# Altium PCB Dollatest.PcbDoc
Units mil, origin at the board's own origin, x right, y up, seen from the top; angles counter-clockwise.
Board outline 3946.14 x 6250.17 mil, 2 copper layers (Top Layer, Bottom Layer); 19 components, 13 nets, 71 pads, 1 vias.
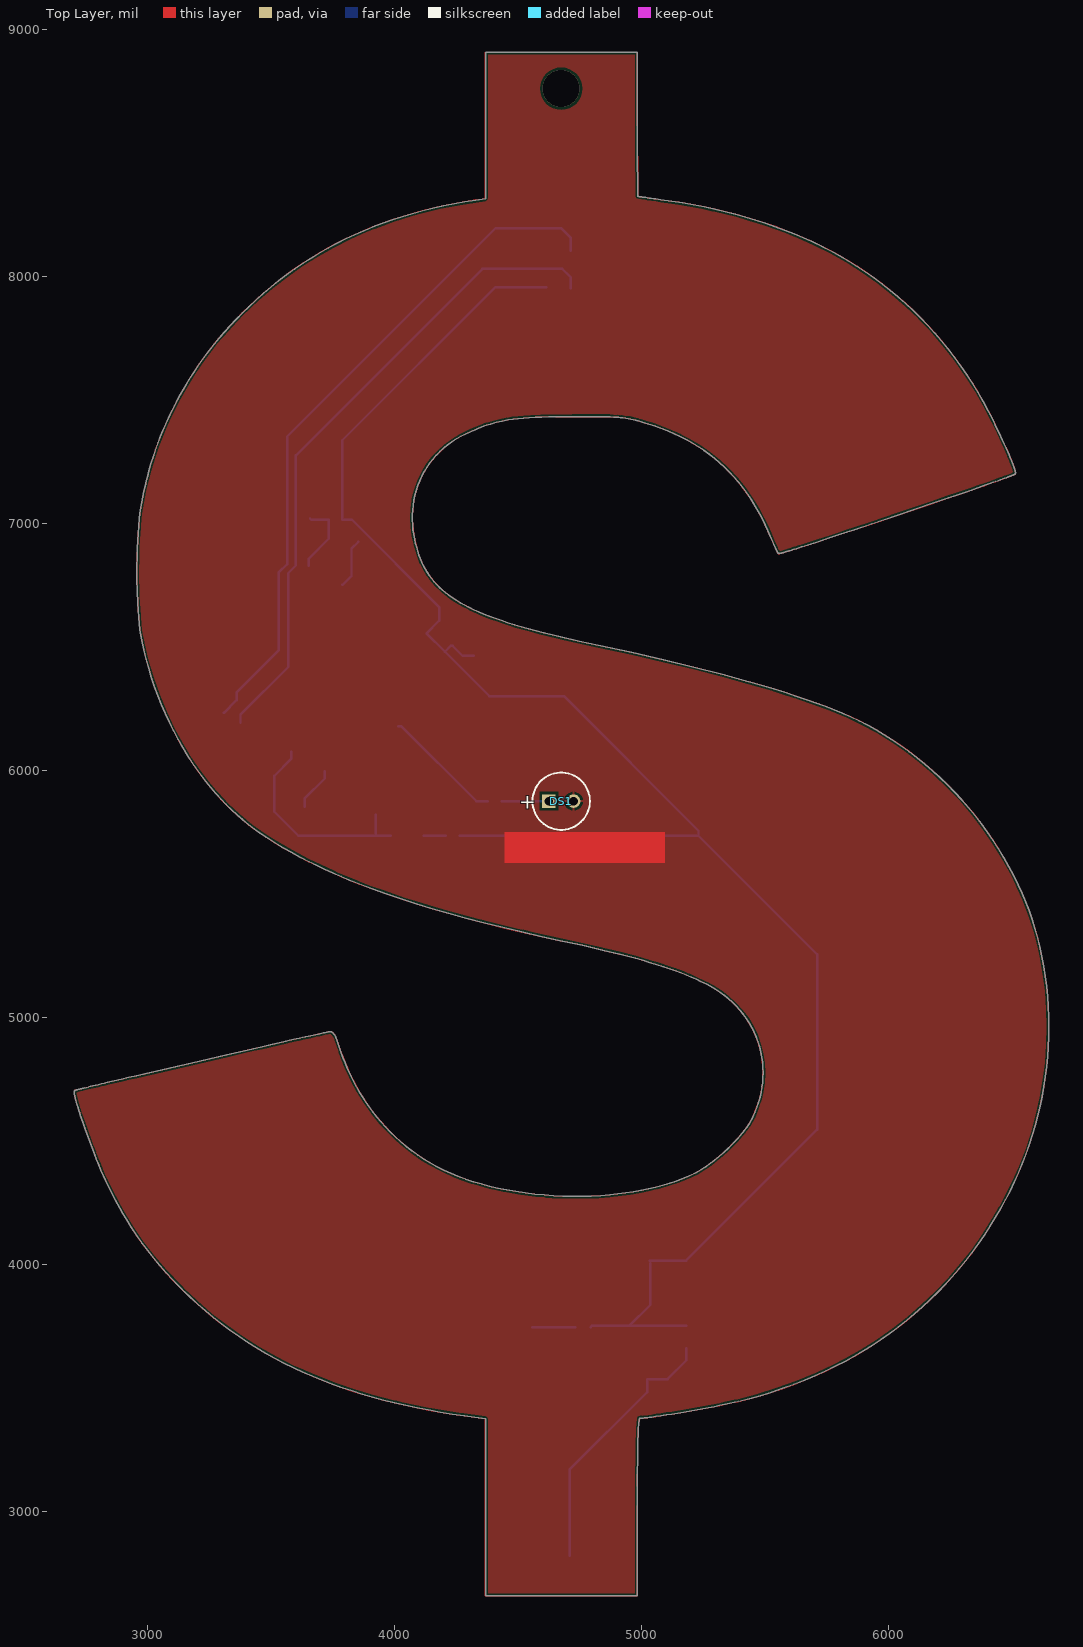
[diagram p0: Top Layer view]
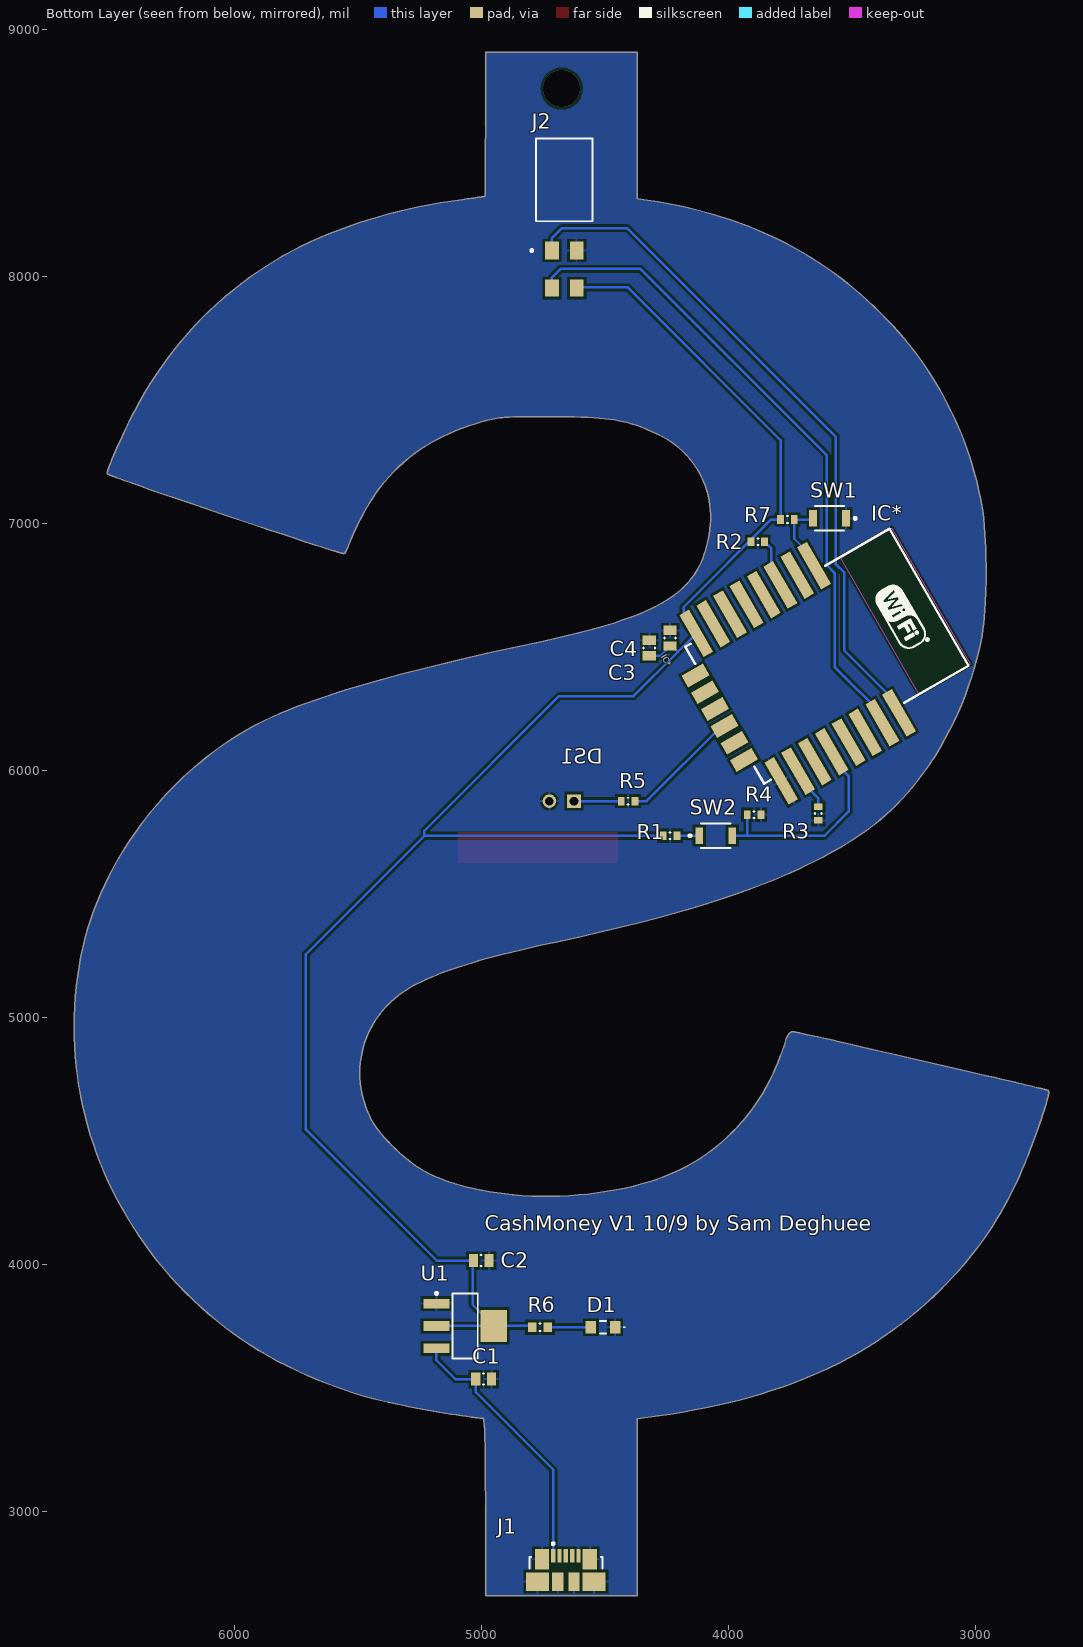
[diagram p1: Bottom Layer view, seen from below]

## Layer stack, top to bottom
Top Solder: solder mask 0.4, Solder Resist, Dk 3.5
Top Layer: signal copper 1.4
Dielectric 1: dielectric 12.6, FR-4, Dk 4.8
Bottom Layer: signal copper 1.4
Bottom Solder: solder mask 0.4, Solder Resist, Dk 3.5

## Board outline
1819 vertices, not listed, extent 2702.07,2657.39 6648.21,8907.56

## Design rules (kind name [scope] priority, off if disabled: settings)
Clearance [All] p1: gap=10 ignorepadtopadclearanceinfootprint=FALSE except(0: Arc-Hole Track-Hole SMDPad-Hole THPad-Hole Via-Hole Fill-Hole Poly-Hole Region-Hole Text-Hole)
PolygonConnect [All] p1: connectstyle=Relief reliefconductorwidth=10 reliefentries=4 polygonreliefangle="90 Angle" airgapwidth=10
RoutingVias [All] p1: holewidth=28 width=50 viastyle="Through Hole" minholewidth=28 minwidth=50 maxholewidth=28 maxwidth=50
SolderMaskExpansion [All] p1: expansion=4
Width [All] p1: maxlimit=10 minlimit=10 preferedwidth=10
30 further rules are at their usual default settings.

## Components (designator, comment, footprint, x,y, rotation, side; value= is the part's Value field where it differs from the comment)
C1 "100nF" CAPC0805(2012)145_L 4990,3535 r0 bottom
C2 "10uF" CAPC0805(2012)145_L 5000,4015 r0 bottom
C3 "1uF" CAPC0805(2012)145_L 4319.29,6495 r270 bottom
C4 "0.1uF" CAPC0805(2012)145_L 4235,6535 r270 bottom
D1 "LTST-C171AKT" LTST-C171AKT_V 4506.69,3745 r180 bottom
DS1 "WP7113SGC" KING-WP7113SGC_V 4674,5875 r0 top
IC* "ESP8266 ESP-12-E" "ESP8266 ESP-12-E" 3867.41,5909.33 r240 bottom
J1 "47346-0001" MOLX-47346-0001-5_V 4657.03,2722.87 r180 bottom
J2 "SMH-102-02-T-D" SMTC-SMH-102-02-X-D 4663.34,8240 r180 bottom
R1 "10K" RESC0603(1608)_L 4235,5735 r180 bottom
R2 "100K" RESC0603(1608)_L 3880,6925 r180 bottom
R3 "470R" RESC0603(1608)_L 3635,5825 r90 bottom
R4 "470R" RESC0603(1608)_L 3895,5820 r0 bottom
R5 "100K" RESC0603(1608)_L 4405,5875 r180 bottom
R6 "300R 5% 0603(1608)" RESC0603(1608)_N 4761.69,3745 r0 bottom value="100000.00 Ohm"
R7 "100K" RESC0603(1608)_L 3760,7015 r0 bottom
SW1 "B3U-1000P" OMRON-B3U-1000_V 3590,7020 r0 bottom
SW2 "B3U-1000P" OMRON-B3U-1000_V 4050,5735 r180 bottom
U1 "LD1117AS33TR" SOT-223_M 5065,3750 r180 bottom

## Footprints (in the part's own frame and the unit in brackets; to place one, negate y for a bottom-side part, rotate by r counter-clockwise, add the part's x,y. Pads: shape width x height; smd on the part's side, far side on the other; paste and mask are expansions set on the pad)
CAPC0805(2012)145_L [mm]
  rect 0.95x1.35 smd: 1(-0.8,0) 2(0.8,0)
  silkscreen extent -0.05,-0.58 0.05,0.58, body extent -1.1,-0.72 1.1,0.72, height 1.45
"ESP8266 ESP-12-E" [mil] "ESP8266 ESP-12-E"
  rect 196.85x45 smd: 1(-688.98,646) 2(-688.98,568) 3(-688.98,489) 4(-688.98,411) 5(-688.98,331) 6(-688.98,253) 7(-688.98,175) 8(-688.98,96) 15(0,95) 16(0,174) 17(0,252) 18(0,331) 19(0,410) 20(0,488) 21(0,568) 22(0,646)
  rect 55x100 smd: 9(-543,7.87) 10(-465,7.87) 11(-387,7.87) 12(-307,7.87) 13(-229,7.87) 14(-149,7.87)
  silkscreen extent -665,30 -25,985, body extent -650,30 -20,974
KING-WP7113SGC_V [mm] "THD, 2-Leads, Dia 5.9mm, Body Length 8.6mm"
  rect 1.4x1.4 hole 0.889: 1(-1.27,0)
  round 1.4 hole 0.889: 2(1.27,0)
  silkscreen extent -2.95,-2.95 2.95,2.95, body extent -2.95,-2.95 2.5,2.95, height 15.5
LTST-C171AKT_V [mm]
  rect 1.1x1.25 smd: A(-1.25,0) C(1.25,0)
  silkscreen extent -0.3,-0.63 2.25,0.63, body extent -1,-0.63 1,0.63, height 0.8
MOLX-47346-0001-5_V [mm] "SMD, 5-Leads, Body 7.5x5mm, Pitch 0.65mm"
  rect 0.45x1.38 smd: 1(-1.3,2.46) 2(-0.65,2.46) 3(0,2.46) 4(0.65,2.46) 5(1.3,2.46)
  rect 1.475x2.1 smd: 6(-2.462,2.1) 7(2.462,2.1)
  rect 2.375x1.9 smd: 8(-2.913,-0.2) 11(2.913,-0.2)
  rect 1.175x1.9 smd: 9(-0.837,-0.2) 10(0.837,-0.2)
  silkscreen extent -3.75,1.16 3.75,3.82, body extent -3.99,-2.78 3.99,2.65, height 2.69
OMRON-B3U-1000_V [mm] "SMD, 2-Leads, Body 3x2.5mm"
  rect 0.8x1.7 smd: 1(-1.7,0) 2(1.7,0)
  silkscreen extent -2.77,-1.25 1.5,1.25, body extent -1.5,-1.25 1.5,1.25, height 1.75
RESC0603(1608)_L [mm]
  rect 0.7x0.9 smd: 1(-0.7,0) 2(0.7,0)
  silkscreen extent -0.05,-0.35 0.05,0.35, body extent -0.85,-0.47 0.85,0.47, height 0.6
RESC0603(1608)_N [mm] "Chip Resistor, Body 1.6x0.8mm, IPC Medium Density"
  rect 0.9x1 smd: 1(-0.8,0) 2(0.8,0)
  silkscreen extent -0.05,-0.4 0.05,0.4, body extent -0.85,-0.47 0.85,0.47, height 0.6
SMTC-SMH-102-02-X-D [mm] "Horizontal SMT Socket Assembly, 2x2 Pins, 2.54mm Pitch, Female"
  rect 1.42x1.83 smd: 1(-1.27,-3.453) 3(1.27,-3.453)
  rect 1.42x1.73 smd: 2(-1.27,-7.313) 4(1.27,-7.313)
  silkscreen extent -3.47,-3.58 2.92,8.08, body extent -2.79,-7.67 2.79,8.08, height 4.95
SOT-223_M [mm] "SOT223, 4-Leads, Body 6.5x3.5mm, Pitch 2.3mm, Lead Span 7mm, IPC Low Density"
  rect 2.7x1 smd: 1(-2.95,2.3) 2(-2.95,0) 3(-2.95,-2.3)
  rect 2.7x3.3 smd: 4(2.95,0)
  silkscreen extent -3.08,-3.35 1.3,3.47, body extent -1.85,-3.35 1.85,3.35, height 1.8

## Part data
C1 C2 C3 C4: library part CMP-1590-00003-1, "0805 (2012 Metric) Chip Capacitor", Case-EIA=0805, Case-Metric=2012, PackageReference=CAPC0805(2012)145
D1: library part CMP-1674-00004-3, "LED AMBER CLR THIN 0805 SMD", Manufacturer=Lite-On, ComponentLink1Description=Datasheet, ComponentLink1URL=http://optoelectronics.liteon.com/upload/download/DS-22-99-0170/S_110_LTST-C171AKT.pdf, PackageReference=C171AKT, PartNumber=LTST-C171AKT
DS1: library part CMP-1757-00001-1, "The Super Bright Green Source Color Device, 2.2 V, -40 to 85 degC, 2-Pin THD, RoHS, Tape and Reel", Case\Package=0603, Case Code (Metric)=1608, Colour=Yellow, Forward Current="20 mA", Forward Voltage="2.1 V", Max Operating Temperature="85 degC", Min Operating Temperature="-40 degC", Package Quantity=4000, Power Rating="52 mW", Case Code (Imperial)=0603, ComponentLink1Description=Datasheet, ComponentLink1URL=http://www.kingbrightusa.com/images/catalog/SPEC/WP7113SGC.pdf, DatasheetVersion="Rev. 9B, 01/2015", Height="0.8 mm", Illumination Colour=Yellow, Length="1.6 mm", Lens Style=Diffused, Luminous Intensity="8 mcd", Mount="Surface Mount", Nominal Vf="2.1 V", Nominal Wavelength="586 nm", PackageDescription="2-Pin Through Hole Device, Dia 5.9 mm, Body Length 8.6 mm", PackageReference=WP7113SGC, Packaging="Tape and Reel", Pins=2, Radiation Hardening=No, RoHSCompliant=true, Viewing Angle="170 degrees", Width="0.8 mm"
J1: library part CMP-2000-05246-1, "Micro-USB B Receptacle with Flange, -30 to 85 degC, 5-Pin SMD, RoHS, Tape and Reel", Color=Black, Manufacturer=Molex, Maximum Current Rating=1.8/ContactA, Maximum Voltage Rating=30VAC, Operating Temperature=-30to85C, Body Orientation=RightAngle, Contact Material=CopperAlloy, Contact Plating=GoldOverPalladiumNickelOverNickel, Datasheet URL=https://datasheet.ciiva.com/30075/304740473460001-io-nectors-30075527.pdf, Datasheet Version=Dec-13, Dimension=7.8x5.43x2.94mm, Gender=RCP, Housing Material=LiquidCrystalPolymer, Manufacturer URL=http://www.molex.com/, Mounting=SurfaceMount, Number of Contacts=5, Number of Ports=1, Number of Terminals=5, Packaging=EmbossedTapeandReel, Part No=47346-0001, Pitch=0.65mm, RoHS=Yes, Termination Method=Solder, Type=MicroUSBTypeB
J2: library part CMP-1023-00148-1, "SMT Horizontal Socket, -55 to 105 degC, 2.54 mm Pitch, 4-Pin, Female, RoHS", Manufacturer=Samtec, Temperature Range="-55 to 105 degC", ComponentLink1Description="Manufacturer URL", ComponentLink1URL=http://www.samtec.com, ComponentLink2Description=Datasheet, ComponentLink2URL=http://www.samtec.com/documents/webfiles/pdf/SMH.PDF, ComponentLink3Description="Package Specification", ComponentLink3URL=http://www.samtec.com/documents/webfiles/cpdf/SMH-1XX-XX-XX-X-XX-MKT.pdf, DatasheetVersion=F-214, Mounting Technology="Surface Mount", Orientation=Horizontal, PackageDescription=".100 [2.54] Horizontal SMT Socket Assembly", PackageReference=SMH-102-02-X-D, PackageVersion="AF, 2/1999", PartNumber=SMH-102-02-T-D, Pitch="2.54 mm", RoHS=True
R1 R2 R3 R4 R5 R7: library part CMP-1591-00001-1, "0603 (1608 Metric) Chip Resistor", Case-EIA=0603, Case-Metric=1608, PackageReference=RESC0603(1608)
R6: library part CMP-1012-00122-1, "100K 0.1W 5% 0603 (1608 Metric)  SMD", Case-EIA=0603, Case-Metric=1608, Power="0.1 W", Tolerance="5 %", Technology=SMT
SW1 SW2: library part CMP-2100-03586-1, "Ultra-Small Tactile Switch, 0.05 A, 12 V, -25 to 70 degC, 2-Pin SMD, RoHS, Tape and Reel", Case/Package=SMD/SMT, Contact Current Rating=50mA, Insulation Resistance=100MOhm, Manufacturer="Omron Electronic Components", Max Operating Temperature=70degC, Min Operating Temperature=-25degC, Operating Force=1.5N, Package Description="2-Pin Surface Mount Device, Body 3 x 2.5 mm", Package Quantity=1, Package Reference=B3U-1000, Voltage Rating (DC)=12V, Actuator Length=0.4mm, Contact Material=Silver, Current Rating=50mA, Datasheet URL=http://www.omron.com/ecb/products/pdf/en-b3u.pdf, Datasheet Version=42005.0, Depth=2.5mm, Electrical Life=200000Cycles, Height=1.2mm, Illumination Type=Illuminated, Lead Free=LeadFree, Length=4mm, Manufacturer URL=http://www.omron.com/, Max Current Rating=50mA, Mount=SurfaceMount, Orientation=Straight, Packaging=TapeandReel, REACH SVHC=Unknown, RoHSCompliant=true, Switch Travel=0.15mm, Termination=SMD/SMT, Throw Configuration=SPST, Weight=0.022g, Width=3mm
U1: library part CMP-0244-00316-1, "1A, Low Drop Positive Voltage Regulator, 3.3V, 4-Pin SOT-223, Tape and Reel", ComponentLink1Description="Manufacturer URL", ComponentLink1URL=http://www.st.com, ComponentLink2Description=Datasheet, ComponentLink2URL=http://www.st.com/internet/com/TECHNICAL_RESOURCES/TECHNICAL_LITERATURE/DATASHEET/CD00002116.pdf, DatasheetVersion=2/12/2011, PackageDescription="4-Pin SOT-223 Package, 6.5 x 3.5 mm Body, 2.3 mm Pitch, 7 mm Lead Span", PackageReference=SOT-223, PackageVersion=2010

## Via types
v1: diameter 150, hole 150, Top Layer to Bottom Layer, 1 vias

## Nets (pads, with @x,y where several pads share a name; then routed paths per layer and width w, separated by ;. In a path a pad name is that pad's centre, name@x,y a point inside that pad or via, vN(x,y) a via of type N, cw(c..) or ccw(c..) an arc to the next point about the centre after c; other vN are vias at no path point)
+3V3: C2.2 C3.2 C4.2 IC*.8 J2.4 R1.1 R2.1 R6.2 R7.2 U1.2 U1.4 | length 7600.8
  Bottom Layer w10: R1.1 5230,5735 ; C3.2 4275,6463.5 C4.2 4226.27,6503.5 4202.76,6480 ; J2.4@4613.34,7955 4406.22,7955 3787.56,7336.34 R7.2 3826.13,7015 4180,6661.13 4180,6605.24 IC*.8 4202.76,6480 ; R6.2 4798.19,3750 U1.4 ; C2.2 5180,4015 5710,4545 5710,5255 5230,5735 ; C2.2@5035,4005 5035,3836.14 U1.4 ; U1.2 U1.4 ; 4202.76,6480 4382.76,6300 4685,6300 5230,5755 5230,5735
+5V: C1.2 J1.1 U1.3 | length 1084.5
  Bottom Layer w10: J1.1 4708.21,3168.21 5021.5,3481.5 C1.2 5105,3535 5181.14,3611.14 U1.3
GND: C1.1 C2.1 C3.1 C4.1 D1.C DS1.2 IC*.15 J1.5 J1.6 J1.7 J1.8 J1.9 J1.10 J1.11 J2.3 R3.1 R4.1 SW1.1 U1.1
LED: IC*.12 R5.2 | length 489.3
  Bottom Layer w10: IC*.12 4025.86,6179.14 4330,5875 R5.2
NetD1_A: D1.A R6.1 | length 174.3
  Bottom Layer w10: D1.A R6.1
NetDS1_1: DS1.1 R5.1 | length 191.4
  Bottom Layer w10: R5.1 DS1.1
NetIC*_1: IC*.1 R7.1 SW1.2 | length 296.7
  Bottom Layer w10: IC*.1 3652.45,6857.45 3732.44,6937.44 R7.1 3661.93,7015 SW1.2
NetIC*_3: IC*.3 R2.2 | length 201
  Bottom Layer w10: IC*.3 3825,6787.08 3825,6897.56 R2.2
NetIC*_16: IC*.16 R3.2 | length 177.6
  Bottom Layer w10: R3.2 3635,5885 3716.73,5966.73 IC*.16
NetIC*_18: IC*.18 R4.2 SW2.2 | length 869.3
  Bottom Layer w10: IC*.18 3580.76,6045.76 3512.34,5977.34 3512.34,5832.33 3609.67,5735 3928.32,5735 ; R4.2 3922.56,5740.76 3928.32,5735 ; SW2.2 3928.32,5735
NetR1_2: R1.2 SW2.1 | length 90.5
  Bottom Layer w10: SW2.1 R1.2
UART_RX: IC*.21 J2.2 | length 2658.1
  Bottom Layer w10: IC*.21 3375.51,6225.51 3568.75,6418.75 3568.75,6798.75 3600,6830 3600,7275 4355,8030 4678.34,8030 4713.34,7995 J2.2
UART_TX: IC*.22 J2.1 | length 2790.5
  Bottom Layer w10: IC*.22 3360,6284.37 3360,6315 3530,6485 3530,6800 3565,6835 3565,7350.94 4409.06,8195 4673.34,8195 4713.34,8155 J2.1
pads on no net: IC*.2 IC*.4 IC*.5 IC*.6 IC*.7 IC*.9 IC*.10 IC*.11 IC*.13 IC*.14 IC*.17 IC*.19 IC*.20 J1.2 J1.3 J1.4
copper on no net: | length 26516.9
  Top Layer w0.5: 2704.19,4703.14 ccw(c2709.98,4697.3) 2703.3,4702.09 ccw(c2708.81,4698.15) 2702.71,4701.09 ccw(c2708.78,4698.18) 2702.33,4700.13 ccw(c2709.86,4697.85) 2702.21,4699.66 ccw(c2711.75,4697.4) 2702.11,4699.22 ccw(c2716.39,4696.53) 2702.04,4698.78 2701.97,4698.36 ccw(c2717.57,4696.11) 2701.83,4696.72 ccw(c2721.76,4695.93) 2701.81,4695.9 2701.81,4695.48 2701.82,4695.06 2701.84,4694.63 2701.86,4694.19 ccw(c2744.85,4696.73) 2702.01,4692.36 ccw(c2755.53,4697.77) 2702.12,4691.39 2702.25,4690.39 2702.4,4689.34 2702.57,4688.26 2702.76,4687.13 2702.97,4685.96 2703.2,4684.75 2703.45,4683.49 ccw(c2909.26,4725.37) 2704.64,4678.03 2705.34,4675.05 2706.12,4671.9 2706.97,4668.59 2707.88,4665.12 2708.87,4661.51 2709.92,4657.74 2711.04,4653.83 2712.22,4649.77 2717.53,4632.23 2720.52,4622.72 2723.72,4612.78 2727.11,4602.45 2730.68,4591.75 2738.3,4569.41 2746.48,4546.08 ccw(c6131.25,5747.71) 2782.59,4448.86 2791.93,4425.09 2801.18,4402.14 2810.24,4380.3 2819,4359.88 2827.35,4341.19 ccw(c3574.87,4682.57) 2835.2,4324.51 ccw(c4508.29,5132.93) 2885.8,4227.21 ccw(c4215.9,4971.82) 2912.05,4182.16 ccw(c4115.83,4913.49) 3100.09,3937.67 ccw(c4563.43,5323.91) 3139.1,3897.62 ccw(c4281.37,5043.06) 3628.93,3562.82 ccw(c4442.31,5389.92) 3868.6,3474 ccw(c4550.32,5737.45) 3998.78,3438.81 ccw(c4626.51,6055.04) 4136.19,3409.61 ccw(c4700.31,6452.96) 4281.07,3386.29 4367.42,3374.45 4367.42,3020.99 4367.42,2657.13 4675.06,2657.13 4982.7,2657.13 4982.7,3022.06 cw(c35890.28,3025.65) 4982.79,3100.28 4982.91,3135.08 4983.08,3167.13 4983.31,3196.52 4983.59,3223.34 4983.94,3247.69 4984.35,3269.64 4984.84,3289.3 4985.39,3306.76 4986.03,3322.1 4986.37,3329.01 4986.74,3335.42 4987.12,3341.34 4987.53,3346.78 4987.95,3351.76 4988.4,3356.27 4988.86,3360.34 cw(c5163.34,3339) 4989.34,3363.96 cw(c5106.99,3347.09) 4989.84,3367.16 4990.1,3368.6 4990.36,3369.93 cw(c5058.26,3356.07) 4990.62,3371.14 cw(c5045.45,3358.93) 4990.88,3372.25 cw(c5033.59,3361.83) 4991.14,3373.24 cw(c5022.95,3364.69) 4991.38,3374.12 cw(c5013.78,3367.44) 4991.63,3374.88 cw(c5006.27,3369.97) 4991.86,3375.53 cw(c5000.68,3372.14) 4991.95,3375.76 cw(c4995.28,3374.37) 4991.98,3375.83 cw(c4993.83,3375.02) 4992.01,3375.89 cw(c4993.19,3375.32) 4992.03,3375.94 ; 2704.23,4703.17 2704.33,4703.24 2704.65,4703.49 2704.85,4703.64 2705.06,4703.8 2705.26,4703.94 cw(c2712.28,4694.2) 2705.44,4704.07 cw(c2707.02,4701.89) 2705.71,4704.24 cw(c2708.42,4698.86) 2706.07,4704.41 2706.14,4704.44 2706.2,4704.46 2706.25,4704.48 2706.36,4704.52 cw(c2709.13,4697.47) 2706.56,4704.6 2706.65,4704.63 2706.75,4704.66 2706.84,4704.7 2706.93,4704.73 2707.03,4704.76 2707.12,4704.79 2707.31,4704.85 2707.52,4704.91 2707.73,4704.98 2707.96,4705.05 2708.19,4705.12 2708.44,4705.19 2708.69,4705.27 2708.96,4705.34 2709.24,4705.42 2709.83,4705.59 2710.48,4705.77 2711.17,4705.96 2711.92,4706.16 2712.71,4706.37 2713.56,4706.59 2714.46,4706.83 2715.41,4707.08 2718.55,4707.89 2720.9,4708.48 2723.45,4709.12 2726.19,4709.8 2729.12,4710.53 2732.25,4711.3 2735.56,4712.11 2739.05,4712.96 2742.72,4713.85 2750.61,4715.77 2759.18,4717.83 2768.43,4720.05 2778.33,4722.42 2788.85,4724.93 2799.97,4727.57 2811.67,4730.35 2823.93,4733.25 2836.73,4736.27 2863.84,4742.65 2892.83,4749.46 2923.51,4756.64 2955.69,4764.16 2989.21,4771.98 3059.51,4788.33 3208.12,4822.73 3320.88,4848.71 3393.97,4865.48 3429.35,4873.58 3463.71,4881.44 3496.87,4889 3558.85,4903.09 3573.32,4906.37 3600.85,4912.59 3613.87,4915.52 3626.36,4918.33 3638.31,4921.01 3649.69,4923.55 3660.47,4925.96 3680.16,4930.33 3689.02,4932.28 3697.16,4934.07 3704.59,4935.69 3711.29,4937.14 3717.26,4938.42 3722.47,4939.52 3726.94,4940.44 3730.63,4941.17 cw(c3755.21,4817.67) 3735.68,4942.07 cw(c3737.77,4928.15) 3741.87,4941.61 cw(c3737.21,4926.22) 3743.79,4940.89 cw(c3736.17,4923.88) 3745.64,4939.94 cw(c3734.32,4920.76) 3747.41,4938.77 cw(c3731.49,4916.85) 3749.12,4937.42 cw(c3727.44,4912.12) 3750.77,4935.91 cw(c3718.54,4903.22) 3753.88,4932.52 cw(c3713.38,4898.8) 3756.79,4928.68 cw(c3706,4893.7) 3759.5,4924.38 cw(c3698.91,4889.62) 3761.97,4919.66 cw(c3690.34,4885.62) 3766.08,4909.15 ccw(c4990.89,5290.51) 3782.21,4860.75 ccw(c4826.13,5231.95) 3799.63,4814.99 ccw(c4706.78,5183.51) 3818.47,4771.65 ccw(c4560.64,5112.65) 3910.58,4618.16 ccw(c4593.63,5142.17) 4000.89,4517.83 ccw(c4518.96,5059.3) 4144.16,4410.37 ccw(c4556.09,5125.35) 4256.13,4356.64 ccw(c4604.05,5244.44) 4317.64,4334.94 ccw(c4642.61,5367.05) 4383.09,4316.57 ccw(c4683.07,5530.85) 4452.68,4301.46 ccw(c4743.62,5871.84) 4605.06,4280.76 ccw(c4733.91,5734.25) 4871.73,4281.58 ccw(c4748.26,5592.3) 4997.72,4299.63 ccw(c4782.93,5407.31) 5056.92,4312.77 ccw(c4819.91,5260.23) 5112.85,4328.54 ccw(c4894.43,5032.84) 5212.65,4367.65 ccw(c5089.14,4621.48) 5225.35,4374.23 ccw(c5052.54,4688.09) 5238.54,4381.86 ccw(c5010.49,4757.46) 5252.12,4390.46 ccw(c4965.22,4826.32) 5266,4399.92 ccw(c4919.55,4891.14) 5280.09,4410.16 ccw(c4876.72,4948.36) 5294.27,4421.09 ccw(c4808.34,5033.22) 5350.06,4469.87 ccw(c4811.04,5031) 5363.29,4482.88 ccw(c4845.59,4997.14) 5388.21,4509.25 ccw(c4909.94,4938.97) 5399.72,4522.41 ccw(c4967.24,4890.29) 5410.47,4535.43 ccw(c5031.79,4838.67) 5420.35,4548.21 ccw(c5099.88,4787.84) 5429.29,4560.64 ccw(c5167.78,4741.09) 5437.17,4572.64 ccw(c5308.95,4659.25) 5449.62,4594.79 ; 4367.42,8907.82 4675.06,8907.82 4982.7,8907.82 4982.7,8610.6 ccw(c37057.4,8609.99) 4982.77,8540.74 4982.9,8497.37 4982.99,8476.88 4983.09,8457.29 4983.2,8438.67 4983.46,8404.65 4983.53,8396.88 4983.61,8389.41 4983.68,8382.27 4983.76,8375.46 4983.84,8368.98 4983.93,8362.86 4984.01,8357.09 4984.1,8351.69 4984.28,8342.05 4984.38,8337.81 4984.43,8335.85 4984.48,8333.99 4984.53,8332.24 4984.58,8330.59 4984.63,8329.05 4984.68,8327.62 4984.78,8325.1 4984.8,8324.66 4984.81,8324.54 4984.82,8324.42 4984.82,8324.31 4984.83,8324.2 4984.84,8324.08 4984.85,8323.82 4985.45,8323.73 4986.08,8323.65 4986.74,8323.56 4987.44,8323.47 4988.17,8323.37 4988.93,8323.26 4989.74,8323.15 4992.42,8322.78 4994.71,8322.45 4997.18,8322.1 4999.83,8321.72 5002.64,8321.32 5005.63,8320.89 5008.77,8320.43 5012.08,8319.96 5015.54,8319.46 5022.89,8318.39 5030.81,8317.25 5039.24,8316.02 5048.16,8314.72 5057.52,8313.36 5077.45,8310.45 5121.05,8304.05 cw(c4771.46,5912.76) 5296.95,8271.64 cw(c4840.69,6223.59) 5462.02,8227.75 cw(c4913.34,6458.24) 5616.34,8172.3 cw(c5047.01,6756) 6128.05,7833.68 cw(c4982.36,6710.13) 6403.54,7455.26 6410.38,7442.21 6417.47,7428.34 6424.74,7413.8 6432.13,7398.74 cw(c3863.93,6152.76) 6475.28,7305.57 6481.68,7290.92 6487.69,7276.93 6490.52,7270.21 6493.23,7263.71 6495.81,7257.44 6498.25,7251.42 6502.69,7240.2 6503.7,7237.58 6504.67,7235.04 6505.59,7232.57 6506.47,7230.19 6507.31,7227.89 6508.1,7225.67 6508.85,7223.54 6509.55,7221.5 cw(c6292.12,7147.72) 6510.81,7217.7 6511.36,7215.95 6511.87,7214.31 6512.33,7212.77 cw(c6437.04,7190.68) 6512.75,7211.32 cw(c6460.22,7196.99) 6513.1,7209.94 cw(c6474.17,7200.41) 6513.4,7208.63 cw(c6483.02,7202.26) 6513.64,7207.37 cw(c6488.73,7203.22) 6513.81,7206.15 cw(c6493.54,7203.75) 6513.95,7203.79 cw(c6504.41,7203.76) 6513.91,7202.88 cw(c6507.02,7203.52) 6513.8,7202.11 cw(c6508.73,7203.16) 6513.62,7201.48 cw(c6509.77,7202.81) 6513.41,7200.97 cw(c6510.42,7202.47) 6512.89,7200.22 cw(c6510.28,7202.61) 6512.63,7199.96 cw(c6509.37,7203.66) 6512.37,7199.75 ccw(c6517.12,7193.27) 6511.95,7199.42 ; 4367.43,8907.82 4367.43,8606.33 4367.43,8315.14 4327.86,8309.12 ccw(c4639.82,6230.17) 4110.83,8264.76 ccw(c4550.78,6574.44) 3911.94,8200.05 ccw(c4468.3,6780.92) 3408.44,7876.44 ccw(c4667.54,6561.27) 3333.81,7800.7 ccw(c4416.61,6795.02) 3267.96,7724.77 ccw(c4323.38,6872.53) 3131.89,7521.05 ccw(c4564.44,6736.19) 3108.07,7475.92 ccw(c4586.6,6721.94) 3071.71,7399.91 ccw(c4287.83,6856.31) 3041.28,7325.94 ccw(c4252.16,6871.33) 3004.45,7212.11 ccw(c4466.71,6811.14) 2994.01,7171.86 ccw(c4693.44,6755.68) 2984.26,7129.84 ccw(c5030.94,6681.83) 2975.09,7085.64 ccw(c3878.42,6919.97) 2962.6,6988.8 ccw(c4775.98,6838.39) 2958.7,6930.31 ccw(c5296.09,6811.28) 2956.35,6867.86 ccw(c5509.79,6803.96) 2958.69,6677.51 ccw(c4685.78,6765.72) 2962.59,6619.96 ccw(c4085.16,6714.07) 2968.06,6568.81 ccw(c3566.81,6645.56) 2975.09,6526.14 ccw(c4362.06,6808.4) 3161.63,6058.51 ccw(c4176.98,6698.14) 3275.56,5905.99 ccw(c4051.36,6587.08) 3407.77,5779.9 ccw(c3973.96,6492.64) 3479.86,5728.16 ccw(c4475.93,7277.68) 3651.85,5630.23 ccw(c4651.58,7621.79) 3748.12,5584.76 ccw(c4809.12,7977.1) 3852.17,5541.27 ccw(c4999.52,8461.68) 3964.7,5499.53 ccw(c5226.35,9110.69) 4086.41,5459.28 ccw(c5494.93,9970.41) 4218.01,5420.28 ccw(c5812.72,11101.93) 4360.19,5382.28 ccw(c6190,12586.32) 4513.66,5345.03 ccw(c6640.85,14532.12) 4679.12,5308.28 cw(c3152.92,-1895.58) 4841.32,5272 4911.69,5254.78 cw(c4062.39,1897.79) 4975.7,5237.93 cw(c4282.27,2701.47) 5033.95,5221.28 cw(c4451.3,3267.88) 5087.05,5204.65 cw(c4581.15,3663.43) 5135.58,5187.86 cw(c4679.54,3934.07) 5180.16,5170.74 cw(c4751.13,4111.14) 5221.38,5153.1 cw(c4797.94,4215.15) 5259.83,5134.78 ; 4992.1,3376.05 ccw(c4989.6,3377.59) 4992.13,3376.1 ccw(c4989.68,3377.53) 4992.16,3376.16 ccw(c4988.72,3537.65) 5000.62,3376.56 5005.77,3376.97 5011.52,3377.51 5017.85,3378.18 5024.76,3378.98 5032.22,3379.9 5040.23,3380.94 5048.77,3382.09 5057.83,3383.36 5077.88,3386.29 5088.5,3387.9 5099.47,3389.59 5122.31,3393.2 5146.12,3397.09 5170.61,3401.2 5269.73,3418.92 5293.37,3423.42 5315.99,3427.86 5337.31,3432.19 5357.04,3436.35 5374.91,3440.3 5390.62,3444 ccw(c4958.82,5249.39) 5786.91,3588.02 ccw(c5086.26,4987.99) 6453.58,4225.57 ccw(c5165.05,4960.59) 6612.07,5287.23 ccw(c5397.31,5000.41) 6524.61,5536.23 ccw(c5217.08,4916.21) 6014.43,6123.8 ccw(c5311.25,5045.32) 5846.96,6216.05 ccw(c5075.36,4500.89) 5708.35,6271.89 ccw(c4645.67,3333.81) 5625.3,6300.62 ccw(c4328.71,2375.83) 5533.6,6329.73 ccw(c3995.9,1285.46) 5433.65,6359.13 5325.83,6388.69 5210.53,6418.32 5088.14,6447.9 4959.05,6477.33 4823.65,6506.5 cw(c6082.01,12548.27) 4671.56,6540.18 4603.82,6556.77 cw(c5355.77,9517.77) 4541.34,6573.34 cw(c5160.4,8812.08) 4483.91,6590.02 cw(c4999.99,8285.71) 4431.31,6606.93 cw(c4867.02,7893.56) 4383.33,6624.19 cw(c4756.12,7602.82) 4339.76,6641.92 cw(c4663.48,7389.24) 4300.38,6660.23 cw(c4586.43,7234.65) 4264.99,6679.26 cw(c4501.35,7091.23) 4205.26,6719.87 cw(c4436.41,7007.52) 4180.46,6741.69 cw(c4402.62,6972.99) 4139.87,6789.1 cw(c4406.13,6974.29) 4109.82,6842.42 cw(c4457.02,6997.56) 4098.18,6871.65 cw(c4524.6,7021.22) 4088.51,6902.78 cw(c4629.77,7049.78) 4080.57,6935.95 cw(c4481.47,7022.5) 4077.33,7092.37 cw(c4439.49,7026.08) 4285.61,7360.56 cw(c4624.69,6674.33) 4353.91,7390.26 cw(c4547.2,6872.5) 4387.41,7401.56 cw(c4549.45,6860.81) 4458.84,7418 cw(c4582.31,6667.3) 4499.07,7423.52 cw(c4615.27,6367.5) 4543.82,7427.49 cw(c4652.08,5824.25) 4594.25,7430.1 cw(c4688.26,4832.25) 4651.51,7431.54 4716.73,7432 4772.41,7431.96 4796.47,7431.86 4818.27,7431.69 4838.01,7431.42 4855.88,7431.04 4872.09,7430.53 4886.82,7429.87 cw(c4848.58,6697.32) 4900.29,7429.04 cw(c4860.49,6865.92) 4912.67,7428.03 cw(c4873.57,7002.12) 4935.02,7425.38 cw(c4879.63,7050.22) 4975.78,7417.05 cw(c4828.12,6845.44) 4986.34,7414.22 4997.44,7411.05 5009.3,7407.52 5022.11,7403.61 cw(c4758.9,6535.91) 5157.2,7350.49 cw(c4834.81,6692.93) 5273.29,7279.49 cw(c4842.89,6710.5) 5453.82,7078.97 cw(c4691.4,6611.26) 5489.16,7015.75 cw(c4564.19,6546.81) 5520.92,6946.99 5529.37,6927.07 5533.35,6917.86 5535.25,6913.51 5537.07,6909.35 5538.83,6905.39 5540.49,6901.66 5542.82,6896.51 5543.54,6894.92 5544.24,6893.41 5544.92,6891.96 5545.56,6890.58 5546.17,6889.28 5546.75,6888.05 5547.31,6886.9 5547.82,6885.83 5548.07,6885.33 5548.31,6884.84 5548.54,6884.38 5548.76,6883.93 5548.98,6883.5 5549.19,6883.1 5549.39,6882.71 5549.59,6882.34 cw(c5535.83,6875.02) 5549.91,6881.7 5550.04,6881.42 ccw(c5560.94,6886.66) 5550.18,6881.15 ccw(c5556.39,6884.33) 5550.32,6880.88 ccw(c5555.73,6883.97) 5550.7,6880.3 ccw(c5557.49,6885.24) 5550.96,6879.96 ccw(c5560.13,6887.38) 5551.27,6879.59 ccw(c5564.39,6891.12) 5551.67,6879.15 ccw(c5557.9,6884.89) 5552.81,6878.12 ccw(c5555.91,6882.31) 5553.31,6877.79 ccw(c5555.3,6881.24) 5553.77,6877.57 ccw(c5555.03,6880.59) 5554.17,6877.43 ccw(c5554.97,6880.4) 5554.87,6877.33 ccw(c5555.02,6882.06) 5555.16,6877.33 5555.42,6877.33 cw(c5555.5,6874.87) 5555.64,6877.33 ccw(c5556.22,6886.24) 5556.21,6877.31 ccw(c5556.2,6885.27) 5556.83,6877.34 5556.97,6877.35 5557.11,6877.36 5557.24,6877.38 ccw(c5555.44,6895.67) 5558.06,6877.48 ccw(c5554.86,6899.79) 5558.62,6877.56 5558.91,6877.61 5559.2,6877.67 5559.5,6877.72 5559.81,6877.79 5560.13,6877.85 ccw(c5544.35,6952.68) 5561.52,6878.16 5562.28,6878.34 5563.09,6878.53 5563.94,6878.74 5564.83,6878.97 5565.77,6879.21 5566.76,6879.47 5567.79,6879.75 5568.88,6880.05 5573.67,6881.38 5576.35,6882.15 5579.21,6882.98 5582.24,6883.88 5585.45,6884.83 5588.84,6885.85 5592.4,6886.92 5596.12,6888.06 5600.02,6889.25 5617.22,6894.58 5626.75,6897.57 5636.87,6900.77 5647.56,6904.16 5658.81,6907.76 5670.58,6911.53 5682.85,6915.49 5695.61,6919.61 5708.83,6923.9 5765.88,6942.55 5796.6,6952.65 5828.55,6963.2 5861.55,6974.14 5929.98,6996.93 6036.09,7032.52 6176.58,7080.08 6243.22,7102.84 6275.02,7113.76 6305.57,7124.28 6334.69,7134.36 6362.22,7143.93 6387.96,7152.94 6400.1,7157.21 6411.74,7161.31 6422.85,7165.24 6433.4,7169 6443.37,7172.57 6452.75,7175.94 6461.5,7179.12 6469.61,7182.09 6477.07,7184.84 6480.54,7186.13 6483.83,7187.37 6486.96,7188.55 6489.9,7189.67 6492.66,7190.73 6495.24,7191.74 6497.64,7192.68 6499.85,7193.56 6501.86,7194.39 6502.8,7194.77 6503.69,7195.14 6504.53,7195.5 6505.33,7195.84 6506.08,7196.17 6506.79,7196.49 6507.45,7196.79 6508.07,7197.08 6508.64,7197.36 6508.91,7197.49 6509.18,7197.63 6509.43,7197.76 ccw(c6498.86,7217.67) 6509.92,7198.03 ccw(c6500.11,7215.44) 6510.63,7198.45 6510.87,7198.59 6510.99,7198.67 ccw(c6506.48,7205.57) 6511.11,7198.75 ccw(c6507.01,7204.77) 6511.8,7199.28 ccw(c6505.7,7206.32) 6511.95,7199.43 ; 5259.83,5134.77 cw(c5067.84,4744.24) 5411.02,5011.83 cw(c5101.44,4774.96) 5473.42,4658.4 cw(c5027.9,4790.61) 5449.41,4594.93
  other v1: 4674,8760

## Polygon pours and split planes (outlines as drawn)
GND on Bottom Layer "Top Layer-No Net" (solid, remove dead copper, pour order 0): 1817 vertices, not listed, extent 2702.07,2657.39 6648.21,8907.56
GND on Top Layer "Top Layer-No Net1" (solid, pour order 1): 1817 vertices, not listed, extent 2702.07,2657.39 6648.21,8907.56

## Keep-outs
Bottom Layer:
  region: 3337.45,6979.83 3020,6430 3227.56,6310.17 3545,6860

## Other copper
Top Layer:
  rectangle net GND: 4445,5625 5095,5750
Bottom Layer:
  region: 3443.34,6661.13

## Silkscreen, mask and mechanical layers (free items; w line width, h text height)
Bottom Overlay:
  text "CashMoney V1 10/9 by Sam Deghuee" at 4986.47,4135 h60

## Text inside footprints (layer, text, board x,y; h text height)
DS1: Top Overlay "+" at 4504,5845 h59.06
IC*: Mechanical 13 "CUTOUT POLYGON" at 3379.32,6945.1 h10 r60; Mechanical 13 "ANTENNA AREA" at 3362,6955.1 h10 r60
J1: Mechanical 6 "PCB EDGE" at 4940.49,2653.7 h11.81